# EAGLE board testv2 (EAGLE 6.3)
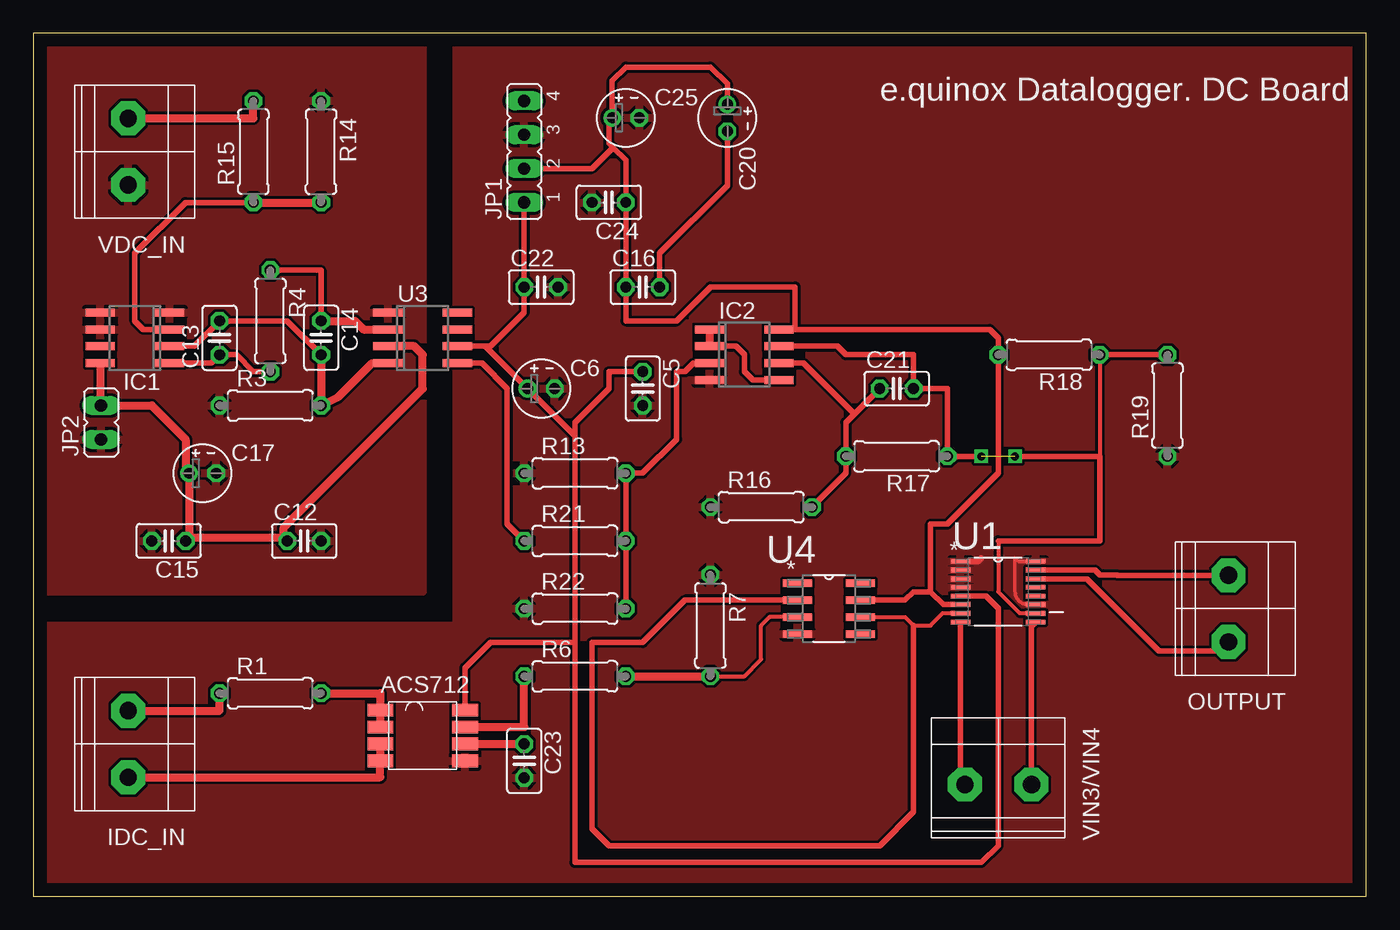
[diagram p0: board, top side]

Size 100 x 64.76 mm. Coordinates in mm from the lower left corner, seen from the top.
Outline: 0,0 100,0 100,64.76 0,64.76 0,0
Copper layers (1*16): Top 0.035mm / dielectric 1.5mm / Bottom 0.035mm
Design rules "default": minimum track width 10mil, minimum drill 24mil, track to track 8mil, track to pad 8mil, pad to pad 8mil, via to via 8mil, smd to smd 8mil, copper to edge 40mil, drill to drill 8mil, minimum pad ring 10mil, minimum via ring 8mil, stop-mask expansion 4mil, vias tented up to drill 0mil, thermal gap 10mil

## Footprints (pad centres in the part's own frame; a part is rotated, then mirrored left to right if it is on the bottom)
C025-025X050 = drill 0.813 octagon: 1 -1.27,0; 2 1.27,0
E2-4 = drill 0.813 pad 1.27: + -1.016,0 | drill 0.813 pad 1.27 octagon: - 1.016,0
SO08 = smd 0.6 x 2.2: 1 -1.905,-2.6; 2 -0.635,-2.6; 3 0.635,-2.6; 4 1.905,-2.6; 5 1.905,2.6; 6 0.635,2.6; 7 -0.635,2.6; 8 -1.905,2.6
CTB1500-2 = drill 1.3 pad 2.54 octagon: P$1 -2.5,0.5; P$2 2.5,0.5
JP4 = drill 0.914 long: 1 -3.81,0; 2 -1.27,0; 3 1.27,0; 4 3.81,0
JP1 = drill 0.914 long: 1 0,-1.27; 2 0,1.27
0207/7 = drill 0.813 octagon: 1 -3.81,0; 2 3.81,0
SOP65P640X120-16N = smd 1.473 x 0.356: 1 -2.819,2.286; 2 -2.819,1.626; 3 -2.819,0.965; 4 -2.819,0.33; 5 -2.819,-0.33; 6 -2.819,-0.965; 7 -2.819,-1.626; 8 -2.819,-2.286; 9 2.819,-2.286; 10 2.819,-1.626; 11 2.819,-0.965; 12 2.819,-0.33; 13 2.819,0.33; 14 2.819,0.965; 15 2.819,1.626; 16 2.819,2.286
SO8 = smd 0.6 x 2.2: 1 -1.905,-2.6; 2 -0.635,-2.6; 3 0.635,-2.6; 4 1.905,-2.6; 5 1.905,2.6; 6 0.635,2.6; 7 -0.635,2.6; 8 -1.905,2.6
SOIC127P600X175-8N = smd 2.184 x 0.559: 1 -2.362,1.905; 2 -2.362,0.635; 3 -2.362,-0.635; 4 -2.362,-1.905; 5 2.362,-1.905; 6 2.362,-0.635; 7 2.362,0.635; 8 2.362,1.905
SOIC8 = smd 1.93 x 0.965: 1 -4.445,1.27; 2 -4.445,0; 3 -4.445,-1.27; 4 -4.445,-2.54; 5 1.905,-2.54; 6 1.905,-1.27; 7 1.905,0; 8 1.905,1.27

## Placement (x,y rotation side)
C5  [C025-025X050]  45.72,38.1 270 top
C6  [E2-4]  38.1,38.1 0 top
C12  [C025-025X050]  20.32,26.67 0 top
C13  [C025-025X050]  13.97,41.91 90 top
C14  [C025-025X050]  21.59,41.91 270 top
C15  [C025-025X050]  10.16,26.67 180 top
C16  [C025-025X050]  45.72,45.72 0 top
C17  [E2-4]  12.7,31.75 0 top
C20  [E2-4]  52.07,58.42 270 top
C21  [C025-025X050]  64.77,38.1 0 top
C22  [C025-025X050]  38.1,45.72 0 top
C23  [C025-025X050]  36.83,10.16 270 top
C24  [C025-025X050]  43.18,52.07 180 top
C25  [E2-4]  44.45,58.42 0 top
IC1  MCP602SN  [SO08]  7.62,41.91 90 top
IC2  MCP602SN  [SO08]  53.34,40.64 270 top
IDC_IN  CTB1500/2  [CTB1500-2]  7.62,11.43 90 top
JP1  [JP4]  36.83,55.88 90 top
JP2  [JP1]  5.08,35.56 0 top
OUTPUT  CTB1500/2  [CTB1500-2]  90.17,21.59 90 top
R1  [0207/7]  17.78,15.24 0 top
R3  [0207/7]  17.78,36.83 0 top
R4  [0207/7]  17.78,43.18 270 top
R6  [0207/7]  40.64,16.51 0 top
R7  [0207/7]  50.8,20.32 270 top
R13  [0207/7]  40.64,31.75 0 top
R14  [0207/7]  21.59,55.88 270 top
R15  [0207/7]  16.51,55.88 90 top
R16  [0207/7]  54.61,29.21 0 top
R17  [0207/7]  64.77,33.02 180 top
R18  [0207/7]  76.2,40.64 180 top
R19  [0207/7]  85.09,36.83 90 top
R21  [0207/7]  40.64,26.67 0 top
R22  [0207/7]  40.64,21.59 0 top
U1  AD7993BRUZ-0  [SOP65P640X120-16N]  72.39,22.86 0 top
U3  IL300  [SO8]  29.21,41.91 270 top
U4  MCP601-E/SN  [SOIC127P600X175-8N]  59.69,21.59 0 top
U$10  ACS712  [SOIC8]  30.48,12.7 0 top
VDC_IN  CTB1500/2  [CTB1500-2]  7.62,55.88 90 top
VIN3/VIN4  CTB1500/2  [CTB1500-2]  72.39,8.89 180 top

## Library data of the parts
C5 C6 C12-C17 C20-C25 R1 R3 R4 R6 R7 R13-R19 R21 R22 = resistor
IC1 IC2 = linear
IDC_IN OUTPUT U3 VDC_IN VIN3/VIN4 = eko-parts
JP1 JP2 = jumper
U1 = ADC; MPN: AD7993BRUZ-0; OC_FARNELL: 1078309; OC_NEWARK: 59K6101; PACKAGE: TSSOP-16; SUPPLIER: Analog Devices
U4 = mcp; MPN: MCP601-E/SN; OC_FARNELL: 1852039; OC_NEWARK: 88H9865; PACKAGE: SOIC-8; SUPPLIER: Microchip
U$10 = Pauls_parts

## Nets
+3V3: C16.1 C20.+ C24.1 C25.+ IC2.8 JP1.2 R18.2 U1.6 U4.7
+5V: C5.1 C6.+ C22.1 JP1.1 U1.5 U3.6 U$10.8
+5V/1: C12.1 C15.1 C17.+ IC1.8 JP2.2 U3.3
DC_SENSE: R15.2 VDC_IN.P$2
GND: C5.2 C6.- C22.2 C23.2 C24.2 C25.- IC2.4 JP1.3 R7.1 R13.1 R16.1 R19.1 R22.1 U1.1 U1.2 U1.3 U1.4 U1.11 U1.16 U4.4 U$10.5
GND1: C12.2 C15.2 C17.- IC1.4 IC1.5 IC1.6 JP2.1 R3.1 R14.1 U3.1 VDC_IN.P$1
GND2: C16.2 C20.-
IDC_OUT: U1.7 U4.2 U4.6
N$1: U1.9 VIN3/VIN4.P$1
N$2: U1.8 VIN3/VIN4.P$2
N$3: IDC_IN.P$2 R1.1
N$5: C13.2 C14.2 IC1.2 R3.2 U3.4
N$7: C14.1 R4.1 U3.2
N$8: R1.2 U$10.1 U$10.2
N$9: C13.1 IC1.1 R4.2
N$14: IC2.3 R13.2 R21.2 R22.2
N$15: R21.1 U3.5
N$20: IC2.1 IC2.2 IC2.5
N$22: C21.1 IC2.6 R16.2 R17.2
N$25: IC1.3 R14.2 R15.1
N$26: IDC_IN.P$1 U$10.3 U$10.4
N$27: R6.1 U$10.7
N$28: C23.1 U$10.6
N$29: R6.2 R7.2 U4.3
N$30: OUTPUT.P$1 U1.14
SCL: OUTPUT.P$2 U1.15
VDC_OUT: C21.2 IC2.7 R17.1 R18.1 R19.2 U1.10

## Tracks (layer width: path | path; a pad name or v marks a point on that pad's centre or on a via)
+3V3
  Top 0.406: 43.5,56.2 44.45,55.24 C24.1 C16.1 44.45,43.18 48.26,43.18 50.8,45.72 57.15,45.72 57.15,42.54 | 43.5,56.2 43.18,56.51 43.18,58.17 C25.+ 43.43,61.21 44.45,62.23 50.8,62.23 52.07,60.96 C20.+ | JP1.2 41.91,54.61 43.5,56.2 | IC2.8 57.15,42.54 | 57.15,42.54 71.75,42.54 72.39,41.91 R18.2 72.39,31.75 68.58,27.94 67.31,27.94 67.31,22.86 | U4.7 65.41,22.23 66.04,22.86 67.31,22.86 | U1.6 68.28,21.89 67.31,22.86
+5V
  Top 0.406: JP1.1 C22.1 36.83,43.81 34.29,41.27 U3.6 33.91,41.27 C6.+ 40.64,34.54 | U$10.8 32.38,17.14 34.29,19.05 40.64,19.05 | 40.64,19.05 40.64,34.54 | 40.64,34.54 40.64,35.56 43.18,38.1 43.18,39.37 C5.1 | 40.64,19.05 40.64,2.54 71.12,2.54 72.39,3.81 72.39,21.59 71.45,22.53 U1.5
+5V/1
  Top 0.61: IC1.8 5.02,36.89 JP2.2 8.89,36.83 11.43,34.29 11.43,32 C17.+ 11.68,26.92 | 11.68,26.92 C15.1 | 11.68,26.92 18.8,26.92 | 18.8,26.92 C12.1 | 18.8,26.92 18.8,27.69 29.21,38.1 29.21,40.64 28.57,41.27 U3.3
DC_SENSE
  Top 0.61: VDC_IN.P$2 16.51,58.38 R15.2
GND  (1 unrouted)
  Top 0.254: U1.16 73.91,25.15 73.66,25.4 73.66,22.86 arc90 74.62,21.89 U1.11
  Top 0.406: U1.1 70.87,25.15 71.12,25.4
  pour Top: 31.75,64.77 100.33,64.77 100.33,1.27 0,1.27 0,20.32 31.75,20.32
GND1
  pour Top: 0,64.77 29.21,64.77 29.21,22.86 0,22.86
GND2
  Top 0.406: C16.2 46.99,48.26 52.07,53.34 C20.-
IDC_OUT
  Top 0.305: U4.6 65.41,20.95 66.04,20.32 67.31,20.32 68.22,21.23 U1.7
  Top 0.406: U4.2 48.9,22.23 45.72,19.05 41.91,19.05 41.91,5.08 43.18,3.81 63.5,3.81 66.04,6.35 66.04,20.32
N$1
  Top 0.406: VIN3/VIN4.P$1 74.89,20.25 U1.9
N$2
  Top 0.406: U1.8 69.57,8.71 VIN3/VIN4.P$2
N$3
  Top 0.61: IDC_IN.P$2 13.97,13.93 R1.1
N$5
  Top 0.406: C14.2 19.05,43.18 C13.2 12.06,41.27 IC1.2
  Top 0.61: U3.4 25.4,40 22.86,37.46 R3.2 C14.2
N$6  (via drill 0.6 pad 0.81)
  other vias: 71.12,33.02
N$7
  Top 0.406: R4.1 21.59,46.99 C14.1
  Top 0.61: C14.1 24.13,43.18 24.77,42.54 U3.2
N$8
  Top 0.61: U$10.2 U$10.1 26.04,15.24 R1.2
N$9
  Top 0.406: R4.2 16.51,39.37 15.24,40.64 C13.1 13.34,40 IC1.1
N$10  (via drill 0.6 pad 0.81)
  other vias: 73.66,33.02
N$14
  Top 0.406: R22.2 R21.2 R13.2 45.72,31.75 48.26,34.29 48.26,39.37 48.9,39.37 49.53,40 IC2.3
N$15
  Top 0.406: 32.38,40 33.66,40 35.56,38.1 35.56,27.94 R21.1
  Top 0.61: U3.5 32.38,40
N$20
  Top 0.406: IC2.2 52.7,41.27 53.34,40.64 53.34,39.37 53.98,38.73 IC2.5
  Top 0.61: IC2.1 IC2.2
N$22
  Top 0.406: C21.1 61.59,36.2 | 61.59,36.2 60.96,35.56 R17.2 60.96,31.75 R16.2 | IC2.6 57.78,40 61.59,36.2
N$25
  Top 0.406: IC1.3 8.26,42.54 7.62,43.18 7.62,48.26 11.43,52.07 R15.1
  Top 0.61: R15.1 R14.2
N$26
  Top 0.61: U$10.3 U$10.4 26.04,8.93 IDC_IN.P$1
N$27
  Top 0.61: U$10.7 36.83,12.7 R6.1
N$28
  Top 0.61: U$10.6 C23.1
N$29
  Top 0.305: R7.2 53.34,16.51 54.61,17.78 54.61,20.32 55.24,20.95 U4.3
  Top 0.61: R6.2 R7.2
N$30
  Top 0.406: U1.14 79.05,23.82 84.45,18.41 89,18.41 OUTPUT.P$1
SCL
  Top 0.406: OUTPUT.P$2 81.32,24.09 81.28,24.13 80.01,24.13 79.65,24.49 U1.15
VDC_OUT  (1 unrouted)
  Top 0.305: R18.1 80.01,33.02 | 72.39,26.67 72.39,22.86 74.02,21.23 U1.10
  Top 0.406: IC2.7 60.33,41.27 60.96,40.64 66.04,40.64 C21.2 68.58,38.1 R17.1 71.12,33.02 | R18.1 R19.2 | 72.39,26.67 80.01,26.67 80.01,33.02 73.66,33.02

## Text on the board
tPlace: e.quinox Datalogger. DC Board